# EAGLE board ME433_Spring2017 (EAGLE 8.1.0)
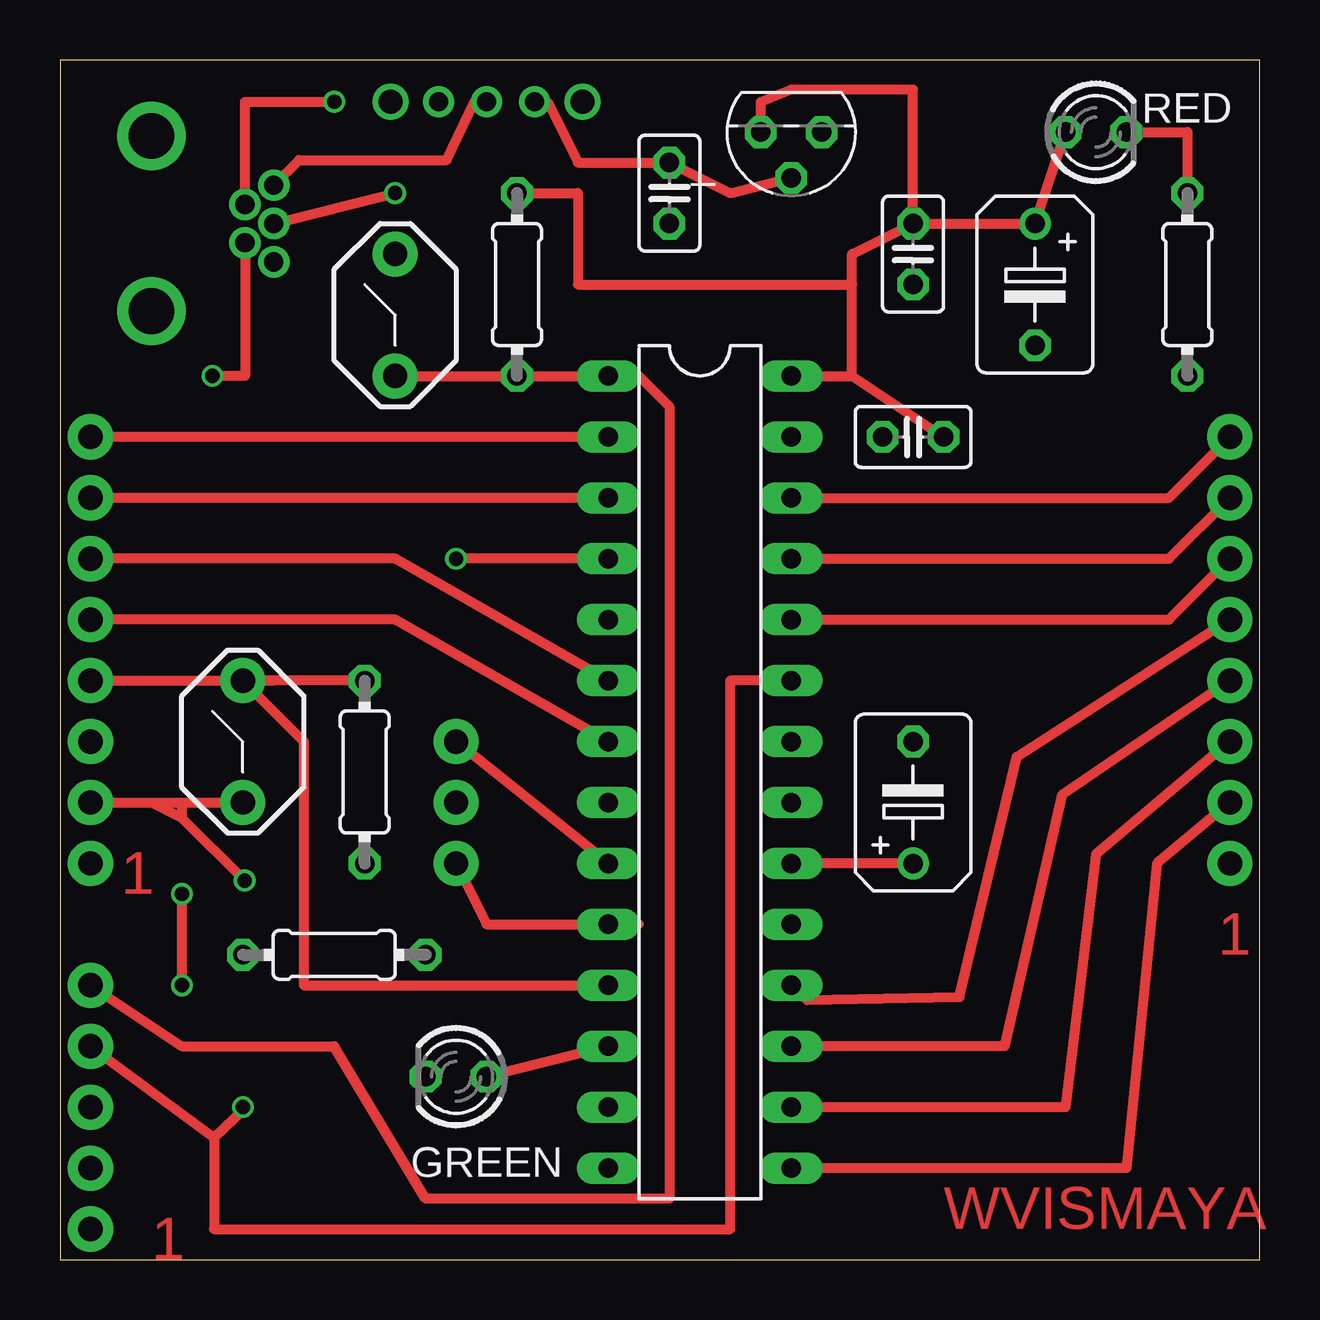
[diagram p0: board, top side]
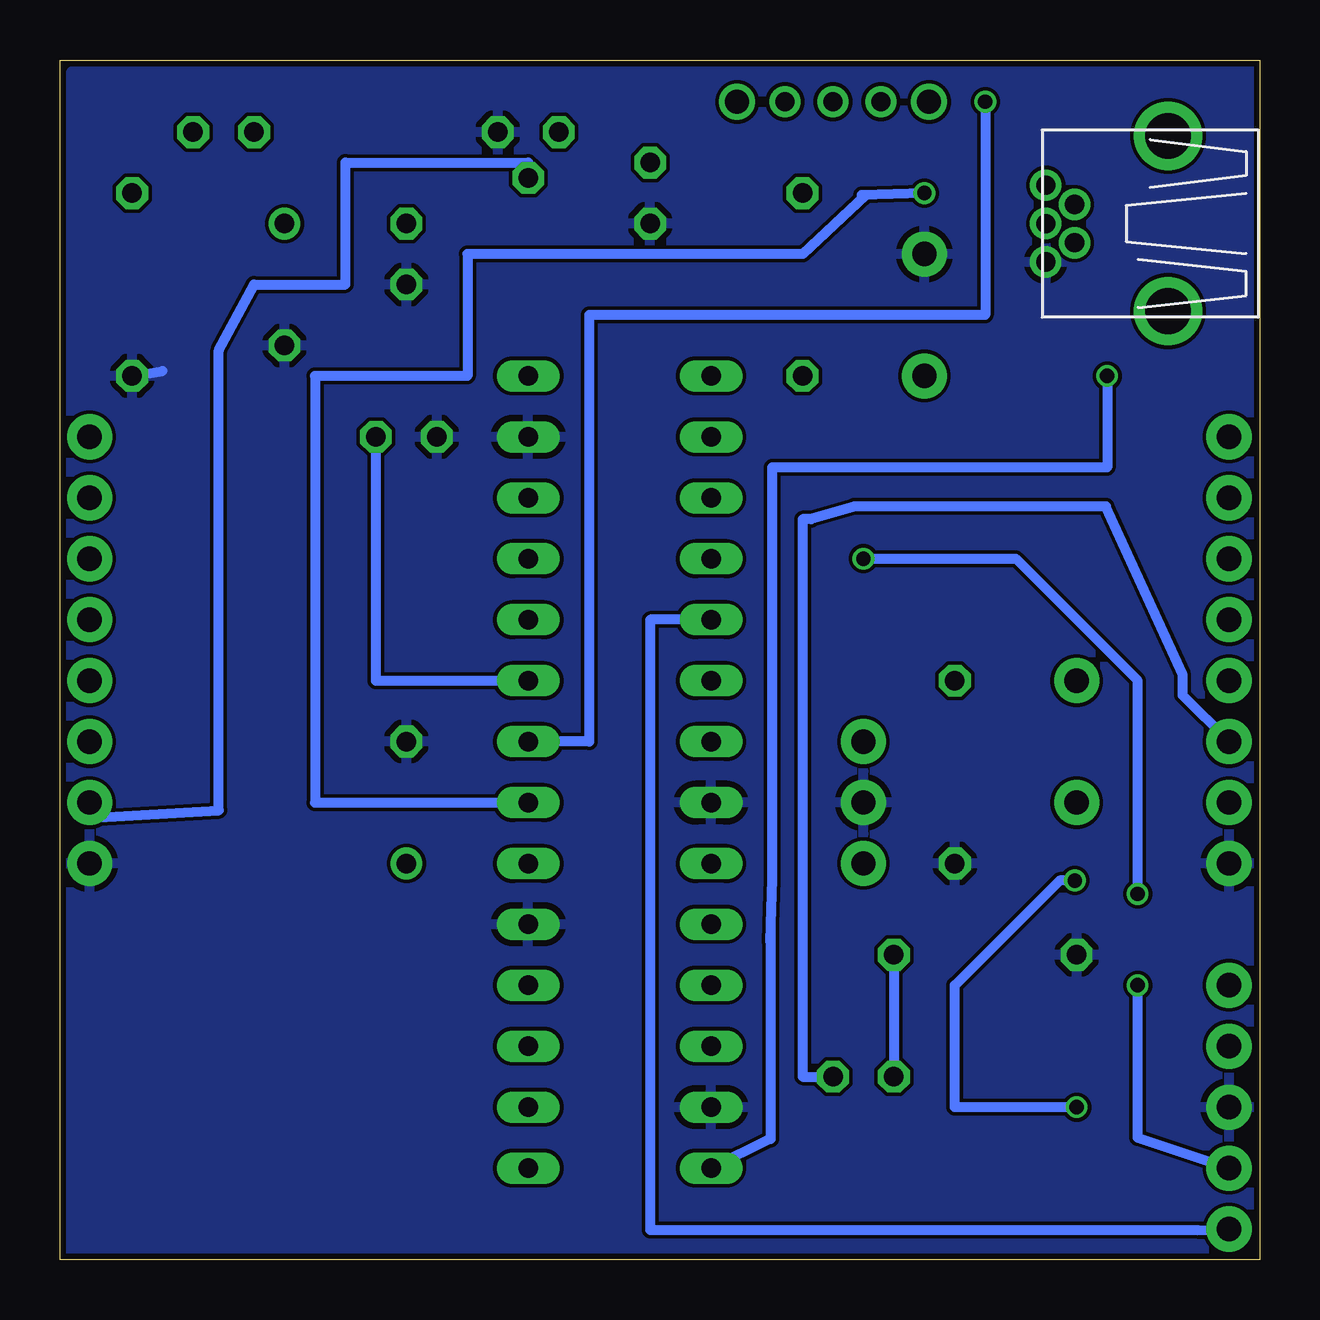
[diagram p1: board, bottom side, seen from below]

Size 50 x 50 mm. Coordinates in mm from the lower left corner, seen from the top.
Outline: 0,0 50,0 50,50 0,50 0,0
Copper layers (1*16): Top 0.035mm / dielectric 1.5mm / Bottom 0.035mm
Design rules "SeeedStudio_2layer_DRU_no_angle_20140221": minimum track width 6mil, minimum drill 12mil, track to track 6mil, track to pad 6mil, pad to pad 6mil, via to via 6mil, smd to smd 0mil, copper to edge 10mil, drill to drill 10mil, minimum pad ring 10mil, minimum via ring 6mil, stop-mask expansion 2mil, vias tented up to drill 100mil, thermal gap 10mil

## Footprints (pad centres in the part's own frame; a part is rotated, then mirrored left to right if it is on the bottom)
TO92 = drill 0.813 octagon: 1 -1.27,0; 2 0,1.905; 3 1.27,0
C025-025X050 = drill 0.813 octagon: 1 -1.27,0; 2 1.27,0
B45181B = drill 0.813: + -2.54,0 | drill 0.813 octagon: - 2.54,0
LED3MM = drill 0.813 octagon: A -1.27,0; K 1.27,0
USB-MB-H = drill 0.8: D+ 5.1,0; D- 3.9,0.8; GND 5.1,-1.6; ID 3.9,-0.8; VBUS 5.1,1.6 | drill 1.9: P$6 0,-3.65; P$7 0,3.65
0204/7 = drill 0.813 octagon: 1 -3.81,0; 2 3.81,0
1X08 = drill 1.016 pad 1.88: 1 0,0; 2 2.54,0; 3 5.08,0; 4 7.62,0; 5 10.16,0; 6 12.7,0; 7 15.24,0; 8 17.78,0
OSC = drill 1.016 pad 1.88: 1 -2.54,0; 2 0,0; 3 2.54,0; 4 -2.54,0
PB = drill 1.016 pad 1.88: 1 -2.54,0; 3 2.54,0
DIL28-3 = drill 0.813 long: 1 -16.51,-3.81; 2 -13.97,-3.81; 3 -11.43,-3.81; 4 -8.89,-3.81; 5 -6.35,-3.81; 6 -3.81,-3.81; 7 -1.27,-3.81; 8 1.27,-3.81; 9 3.81,-3.81; 10 6.35,-3.81; 11 8.89,-3.81; 12 11.43,-3.81; 13 13.97,-3.81; 14 16.51,-3.81; 15 16.51,3.81; 16 13.97,3.81; 17 11.43,3.81; 18 8.89,3.81; 19 6.35,3.81; 20 3.81,3.81; 21 1.27,3.81; 22 -1.27,3.81; 23 -3.81,3.81; 24 -6.35,3.81; 25 -8.89,3.81; 26 -11.43,3.81; 27 -13.97,3.81; 28 -16.51,3.81
SLIDE = drill 0.8: 1 -2,0; 2 0,0; 3 2,0 | drill 1: S1 -4,0; S2 4,0
1X05 = drill 1.016 pad 1.88: 1 0,0; 2 2.54,0; 3 5.08,0; 4 7.62,0; 5 10.16,0

## Placement (x,y rotation side)
_  MCP1702  [TO92]  30.48,46.99 180 top
C1  [C025-025X050]  25.4,44.45 270 top
C2  [B45181B]  35.56,19.05 90 top
C3  [C025-025X050]  35.56,34.29 180 top
C4  [B45181B]  40.64,40.64 270 top
C5  [C025-025X050]  35.56,41.91 270 top
GREEN  [LED3MM]  16.51,7.62 180 top
J1  USB-MB-H  [USB-MB-H]  3.81,43.18 0 top
R1  [0204/7]  46.99,40.64 90 top
R2  [0204/7]  19.05,40.64 90 top
R3  [0204/7]  12.7,20.32 90 top
R4  [0204/7]  11.43,12.7 0 top
RED  [LED3MM]  43.18,46.99 0 top
U$1  BRANCHOUT_1  [1X08]  48.77,16.51 90 top
U$2  BRANCHOUT_1  [1X08]  1.27,16.51 90 top
U$4  OSCOSC  [OSC]  16.51,19.05 90 top
U$5  PB  [PB]  7.62,21.59 90 top
U$6  PIC32MX250  [DIL28-3]  26.67,20.32 270 top
U$8  SLIDE  [SLIDE]  17.78,48.26 0 top
U$10  PICKIT_3  [1X05]  1.27,11.43 270 top
U$11  PB  [PB]  13.97,39.37 90 top

## Library data of the parts
_ C1-C5 GREEN J1 R1-R4 RED U$1 U$2 U$4-U$6 U$8 U$10 U$11 = ME433_Spring2017

## Nets
+3V3: _.3 C3.1 C4.+ C5.1 R2.2 RED.A U$2.2 U$5.1 U$6.23 U$6.28 U$10.2
+5V: _.2 C1.1 U$1.2 U$6.15 U$8.3
A0: U$2.8 U$6.2
A1: U$2.7 U$6.3
A4: GREEN.A U$2.3 U$6.12
B2: U$2.6 U$6.6
B3: U$2.5 U$6.7
B4: R3.2 U$2.4 U$5.3 U$6.11
B7: U$1.3 U$6.16
B8: U$1.4 U$6.17
B9: U$1.5 U$6.18
B13: U$1.6 U$6.24
B14: U$1.7 U$6.25
B15: U$1.8 U$6.26
D+: J1.D+ U$6.21
D-: J1.D- U$6.22
GND: _.1 C1.2 C2.- C3.2 C4.- C5.2 J1.GND R1.1 R3.1 R4.1 U$1.1 U$2.1 U$4.2 U$6.8 U$6.13 U$6.19 U$6.27 U$10.3 U$11.3
ID: J1.ID U$6.14
MCLR~: R2.1 U$6.1 U$10.1 U$11.1
N$1: J1.VBUS U$8.2
N$18: R1.2 RED.K
N$23: GREEN.K R4.2
O1/A3: U$4.1 U$6.10
O2/A2: U$4.3 U$6.9
PGC: U$6.5 U$10.5
PGD: U$6.4 U$10.4
VCAP: C2.+ U$6.20

## Tracks (layer width: path | path; a pad name or v marks a point on that pad's centre or on a via)
+3V3  (via drill 0.6)
  Top 0.406: _.3 29.21,48.26 30.48,48.78 35.56,48.78 C5.1 | C5.1 C4.+ RED.A | U$6.28 33.02,36.83 | R2.2 21.59,44.45 21.59,40.64 33.02,40.64 | 33.02,40.64 33.02,41.91 C5.1 | C3.1 33.02,36.83 | 33.02,36.83 33.02,40.64 | U$2.2 3.81,19.05 | 3.81,19.05 5.08,19.05 | 5.08,19.05 5.08,18.41 | 5.08,19.05 U$5.1 | 5.08,18.41 v7.7,15.8 | 5.08,18.41 3.81,19.05 | U$10.2 6.43,5.08 | U$6.23 27.94,24.13 27.94,1.27 6.43,1.27 6.43,5.08 | 6.43,5.08 7.7,6.27 v7.62,6.35
  Bottom 0.406: U$6.23 36.83,24.13 C3.1 | v7.7,15.8 8.33,15.8 12.7,11.43 12.7,6.35 v7.62,6.35
+5V
  Top 0.406: U$8.3 20.32,48.26 21.59,45.72 C1.1 27.94,44.45 _.2 | U$1.2 45.72,16.51 44.45,3.81 U$6.15
  Bottom 0.406: U$1.2 48.77,18.42 43.38,18.72 43.38,37.9 41.91,40.64 38.1,40.64 38.1,45.72 30.48,45.72 _.2
A0
  Top 0.406: U$6.2 U$2.8
A1
  Top 0.406: U$6.3 U$2.7
A4
  Top 0.406: U$6.12 GREEN.A
  Bottom 0.406: U$2.3 3.2,23.52 3.2,24.38 6.4,31.39 16.89,31.39 18.69,30.86 19.05,30.86 19.05,7.62 GREEN.A
B2
  Top 0.406: U$6.6 13.97,29.21 U$2.6
B3
  Top 0.406: U$6.7 13.97,26.67 U$2.5
B4
  Top 0.406: U$6.11 10.16,11.43 10.16,21.59 U$5.3 | R3.2 U$5.3 | U$2.4 U$5.3 | U$5.3 8.89,24.13
B7
  Top 0.406: U$1.3 43.18,16.89 41.91,6.35 U$6.16
B8
  Top 0.406: U$1.4 41.77,19.36 39.37,8.89 U$6.17
B9
  Top 0.406: U$6.18 31.14,10.82 37.49,10.95 39.88,20.95 U$1.5
B13
  Top 0.406: U$6.24 46.23,26.67 U$1.6
B14
  Top 0.406: U$6.25 46.23,29.21 U$1.7
B15
  Top 0.406: U$6.26 46.23,31.75 U$1.8
D+  (via drill 0.6)
  Top 0.406: J1.D+ v13.97,44.45
  Bottom 0.406: v13.97,44.45 16.59,44.37 16.43,44.37 19.05,41.91 33.02,41.91 33.02,36.83 39.37,36.83 39.37,19.05 U$6.21
D-  (via drill 0.6)
  Top 0.406: J1.D- 7.71,48.26 v11.43,48.26
  Bottom 0.406: v11.43,48.26 11.43,39.37 27.94,39.37 27.94,21.59 U$6.22
GND
  Bottom 0.406: R1.1 45.72,37.03
  pour Bottom: 0,49.53 0,0 49.53,0 49.53,1.27 49.53,49.53
ID  (via drill 0.6)
  Top 0.406: J1.ID 7.71,36.83 v6.35,36.83
  Bottom 0.406: v6.35,36.83 6.35,33.02 20.32,33.02 20.32,15.87 20.38,13.97 | 20.38,13.97 20.4,13.26 | 20.38,13.97 20.38,5.03 U$6.14
MCLR~
  Top 0.406: U$11.1 R2.1 U$6.1 24.13,36.83 25.4,35.56 25.4,2.54 15.24,2.54 11.43,8.89 5.08,8.89 U$10.1
N$1
  Top 0.406: J1.VBUS 9.96,45.83 16.12,45.83 17.28,48.26 U$8.2
N$18
  Top 0.406: RED.K 46.99,46.99 R1.2
N$23
  Bottom 0.406: R4.2 GREEN.K
O1/A3
  Top 0.406: U$4.1 17.78,13.97 U$6.10 24.13,13.97
O2/A2
  Top 0.406: U$6.9 U$4.3
PGC
  Bottom 0.406: U$10.5 2.59,1.22 25.4,1.22 25.4,26.67 U$6.5
PGD  (via drill 0.6)
  Top 0.406: U$6.4 v16.51,29.21 | v5.08,15.24 v5.08,11.43
  Bottom 0.406: v16.51,29.21 10.16,29.21 5.08,24.13 v5.08,15.24 | U$10.4 5.08,5.08 v5.08,11.43
VCAP
  Top 0.406: C2.+ U$6.20

## Text on the board
Top: 1 | 1 | WVISMAYA | 1